# Altium PCB PCB_RAM1.PcbDoc
Units mil, origin at the board's own origin, x right, y up, seen from the top; angles counter-clockwise.
Board outline 3440 x 3440 mil, 4 copper layers (Top Signal, PWR, GND, Bottom Signal), stack 23.756 mil thick; 46 components, 96 nets, 440 pads, 4 vias.
Unrouted connection lines stored in the file: 252.
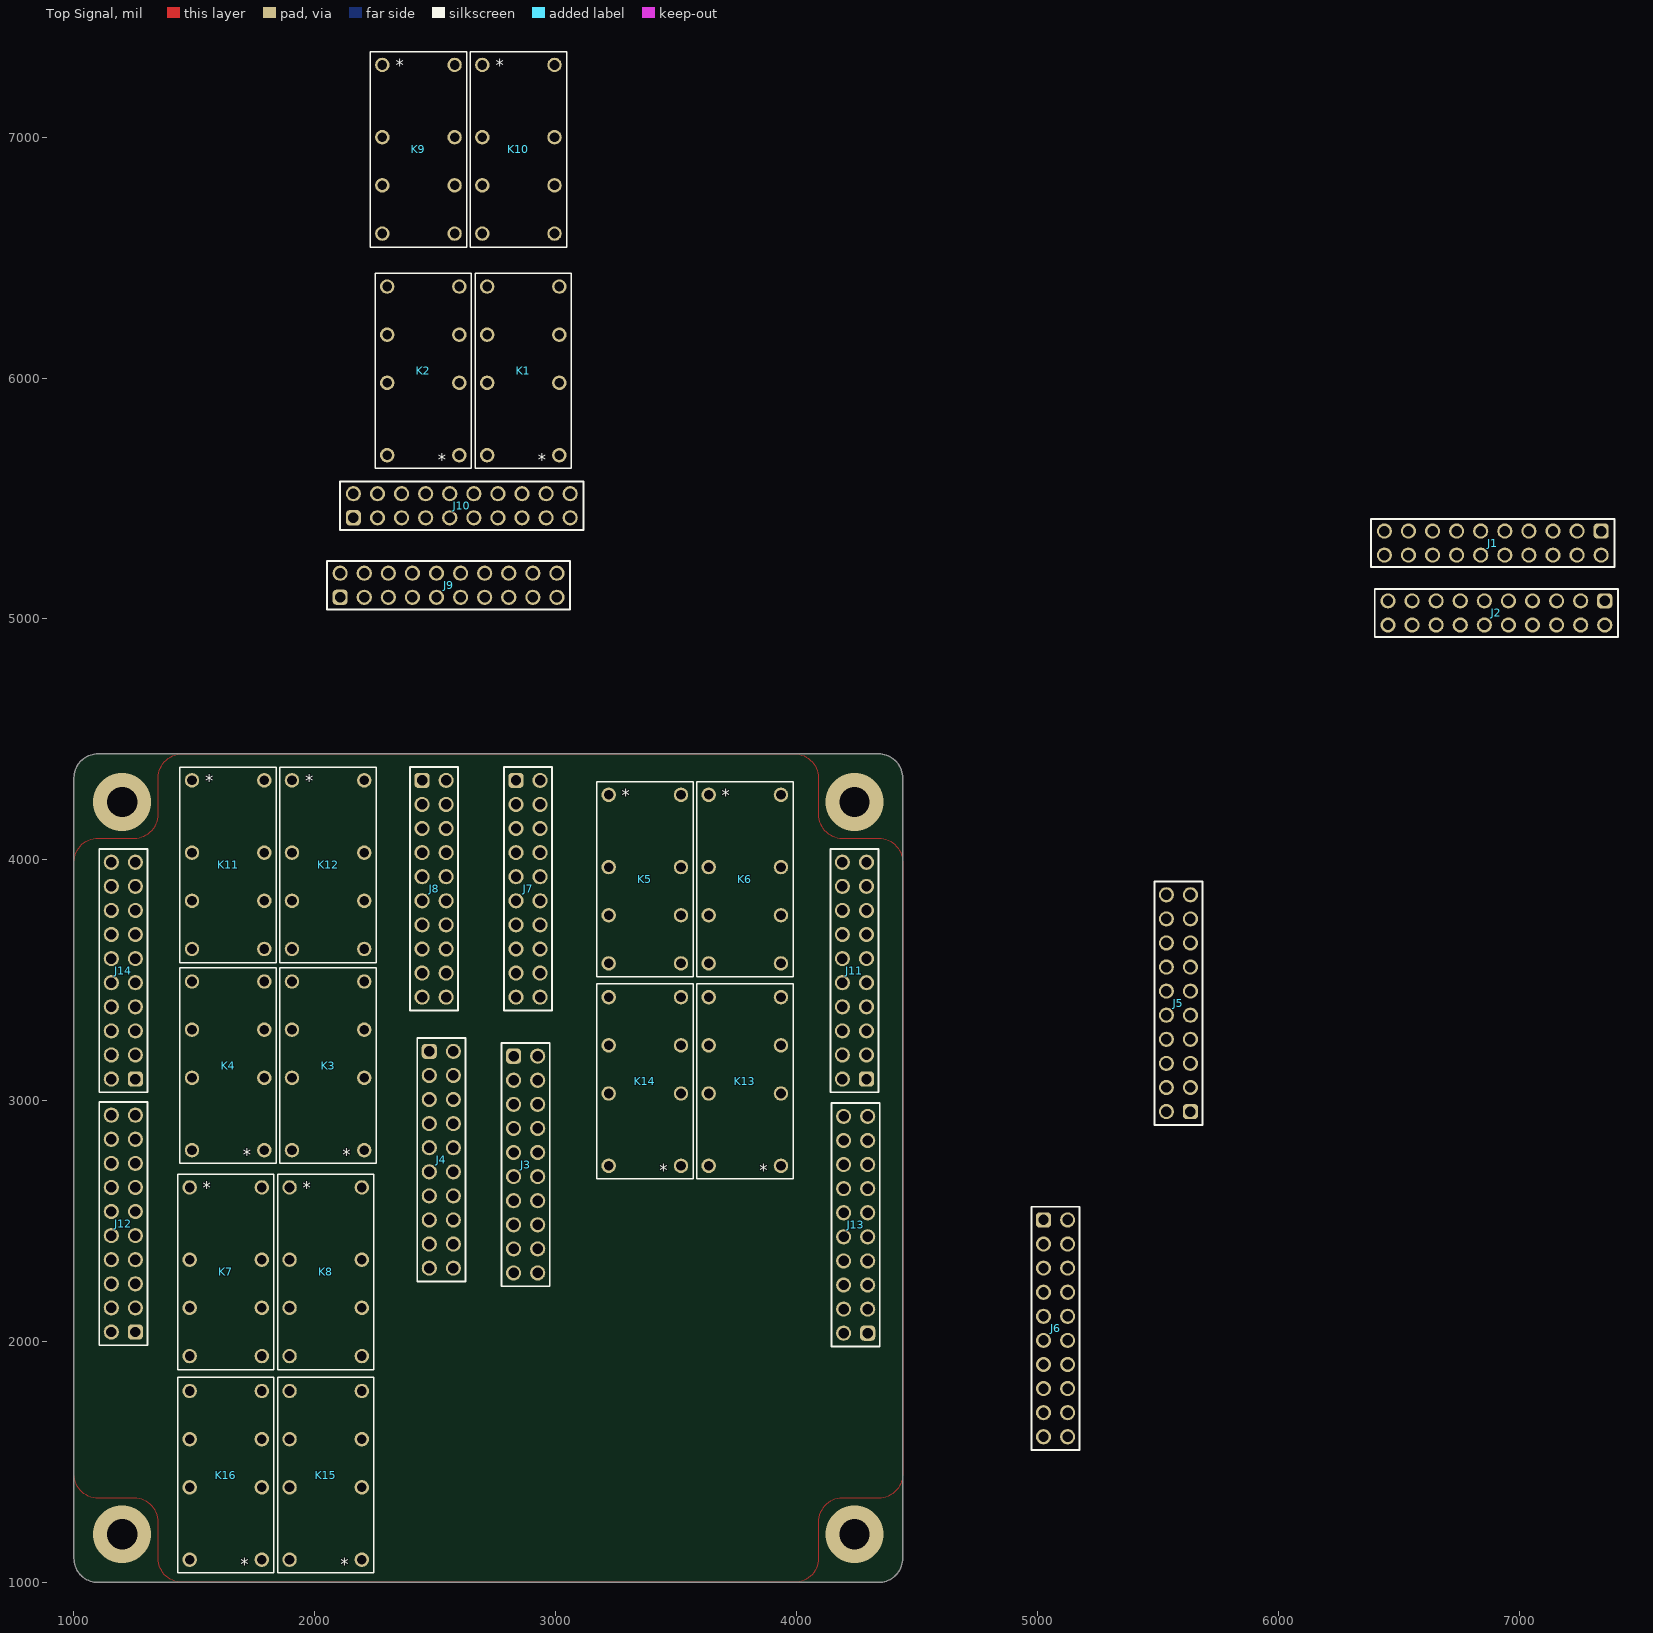
[diagram p0: Top Signal view]
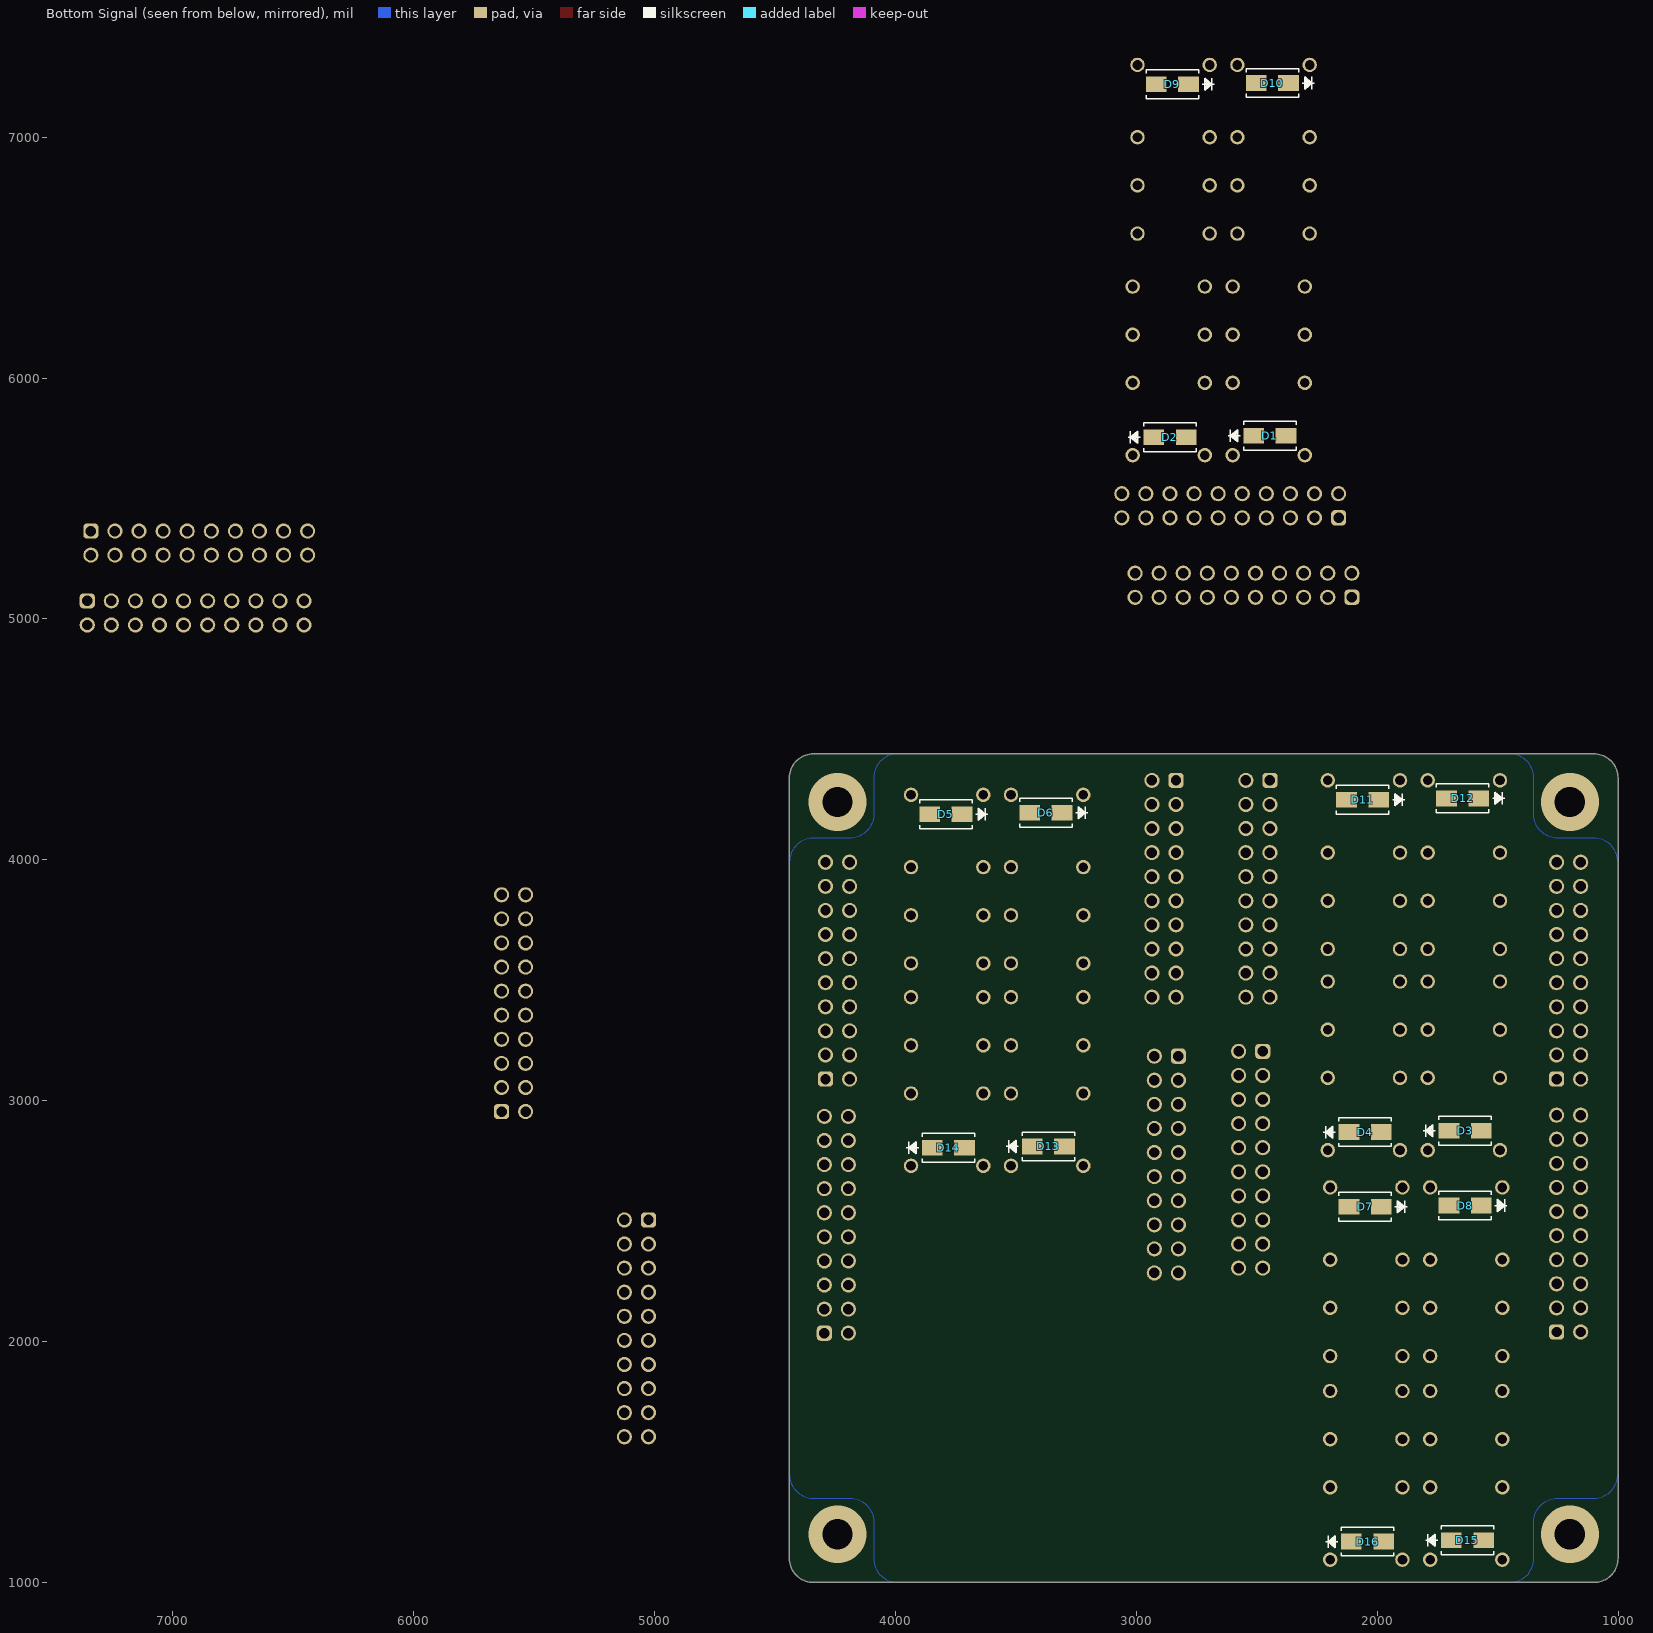
[diagram p1: Bottom Signal view, seen from below]
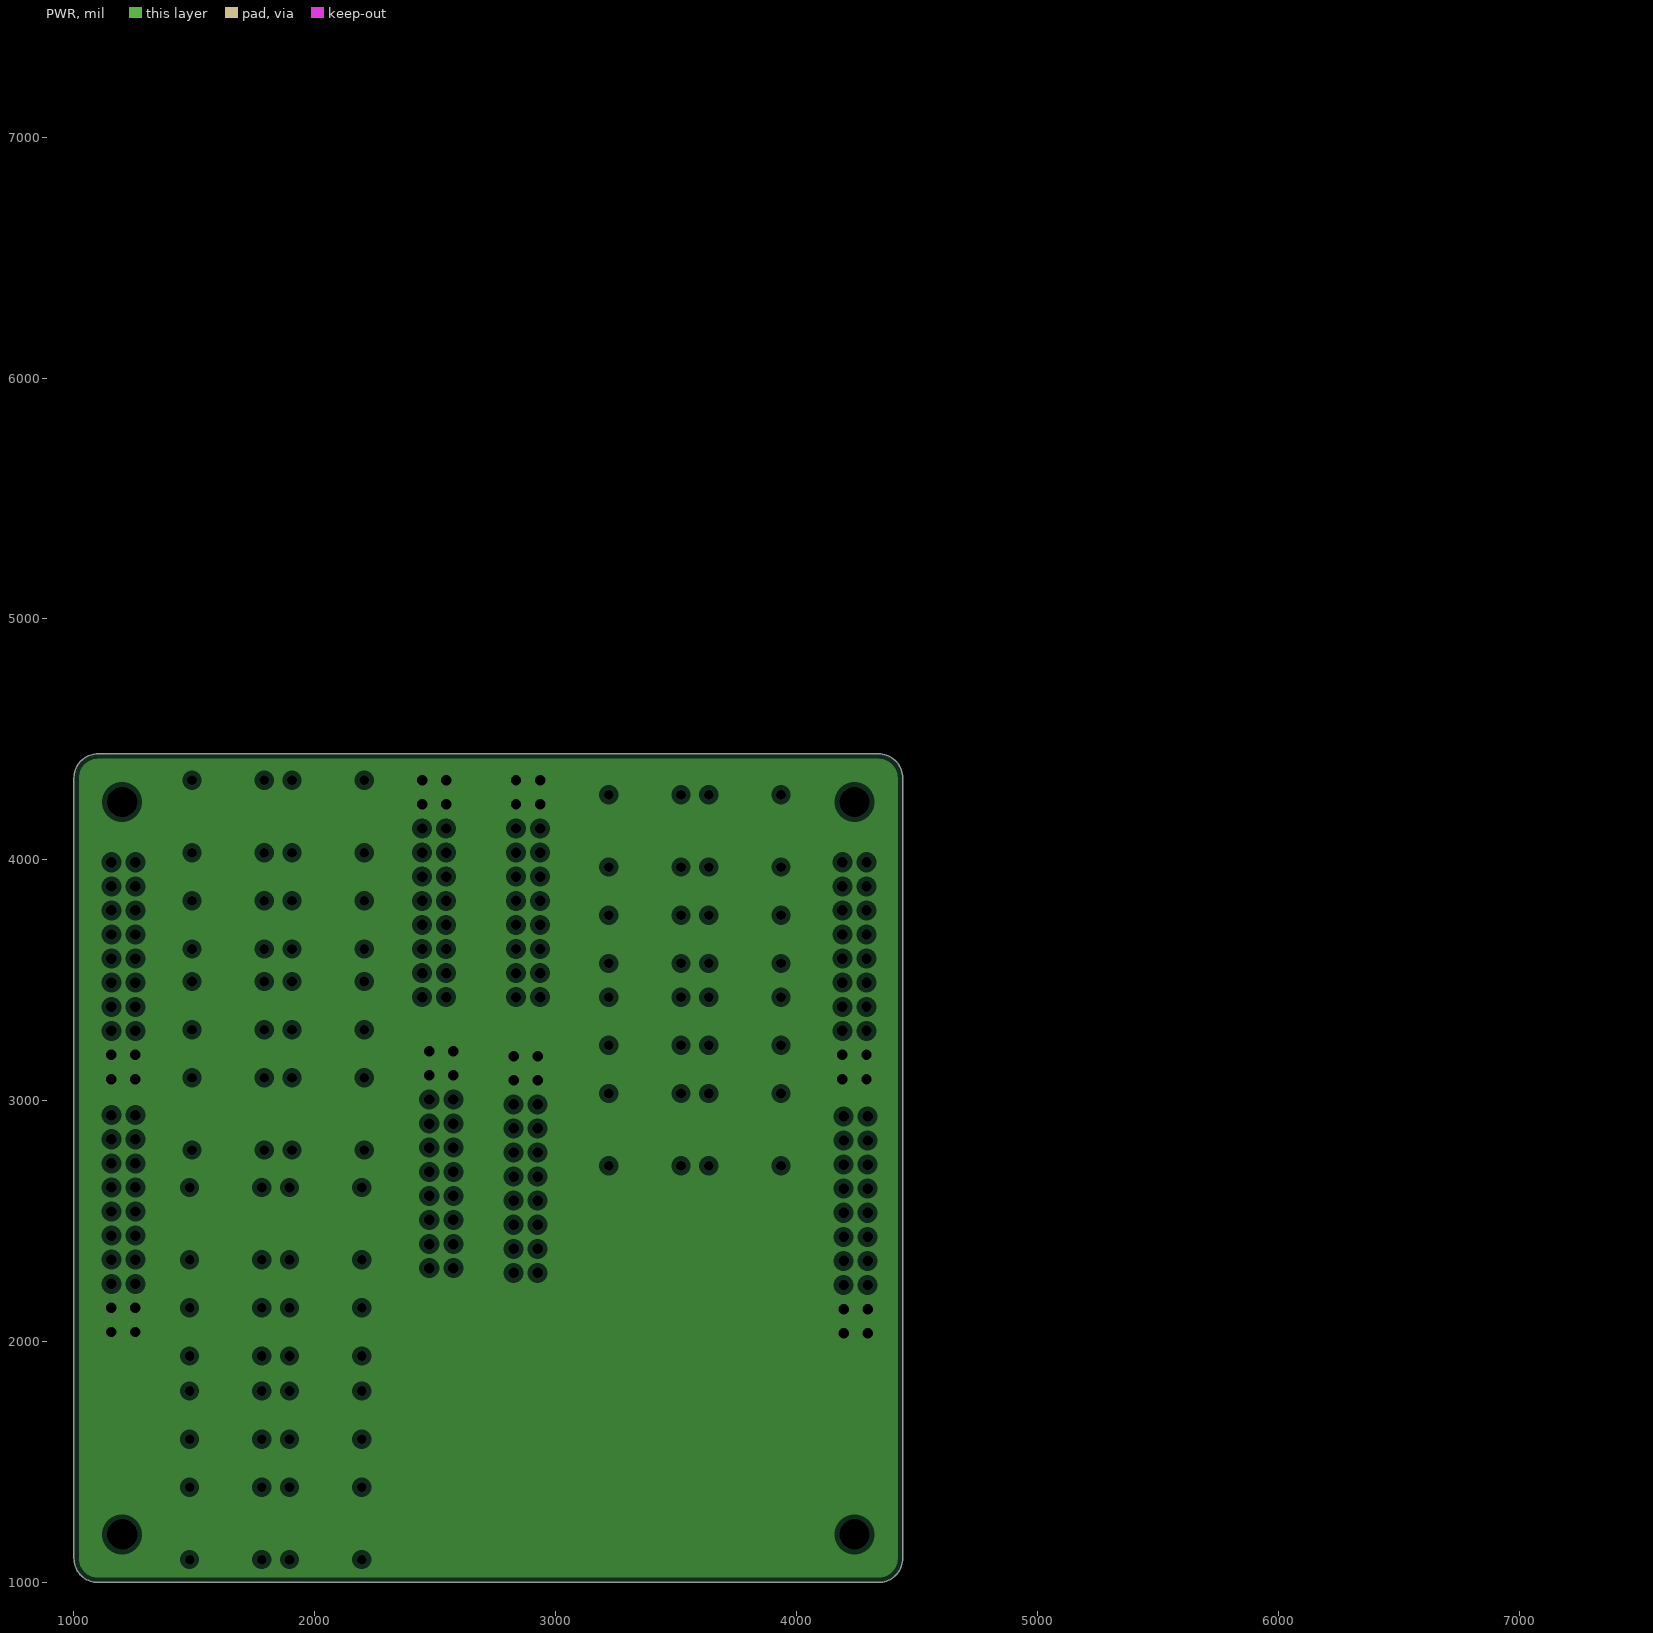
[diagram p2: PWR, clearances drawn from the general rule]
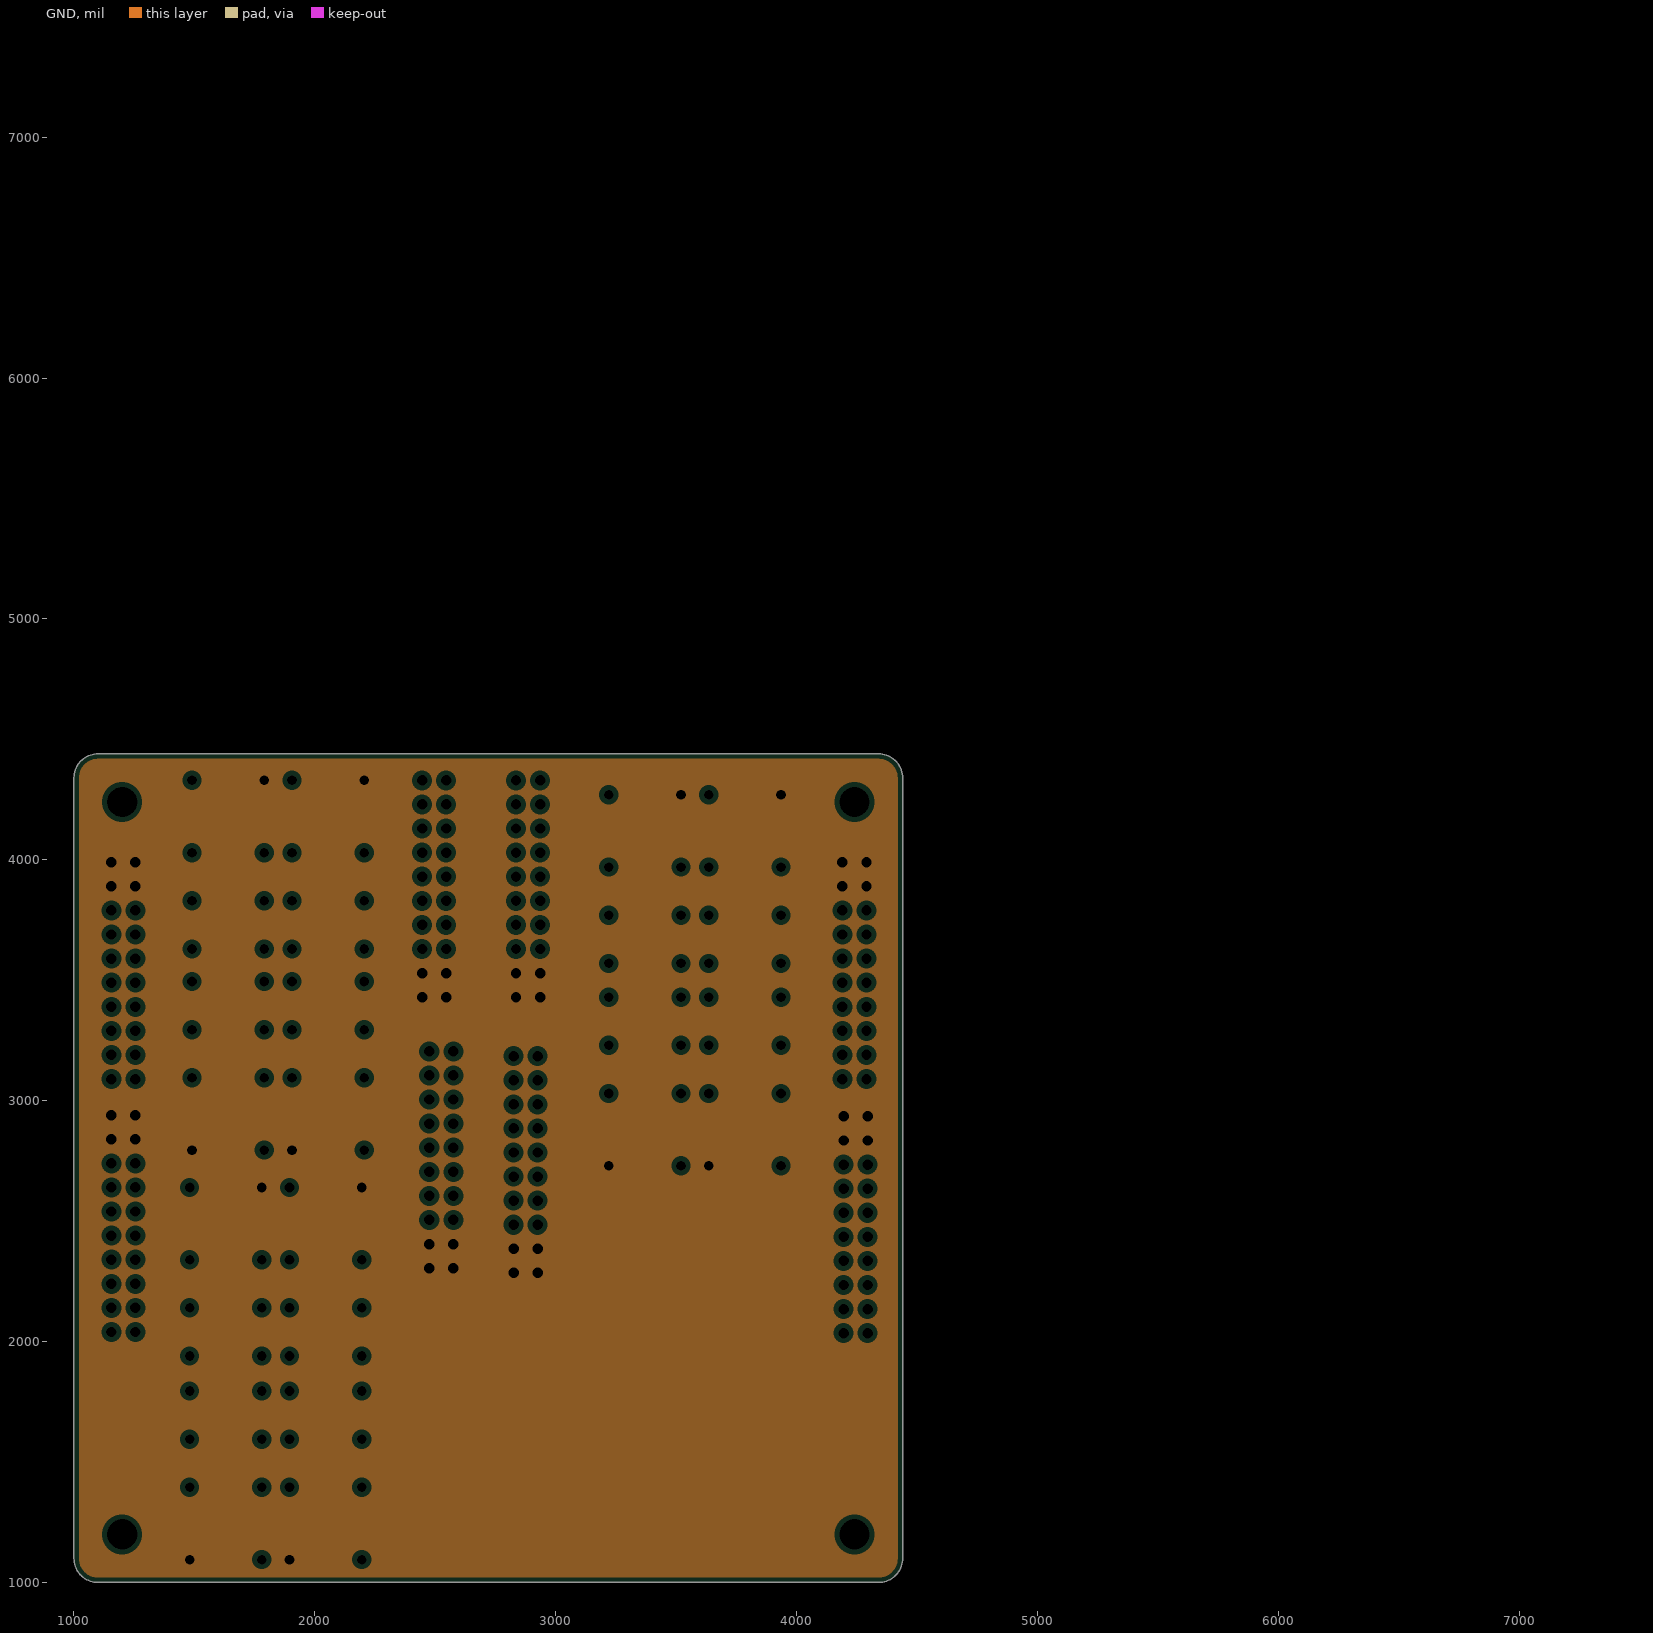
[diagram p3: GND, clearances drawn from the general rule]

## Layer stack, top to bottom
Top Solder: solder mask 0.4, Solder Resist, Dk 3.5
Top Signal: signal copper 1.4
Dielectric 2: prepreg 2.8, PP-006, Dk 4.1
PWR: plane copper 1.378, net +24V
Dielectric 1: dielectric 12.6, FR-4, Dk 4.8
GND: plane copper 1.378, net GND
Dielectric 3: prepreg 2.8, PP-006, Dk 4.1
Bottom Signal: signal copper 1.4
Bottom Solder: solder mask 0.4, Solder Resist, Dk 3.5

## Board outline
1000,4340 cw(c1100,4340) 1100,4440 4340,4440 cw(c4340,4340) 4440,4340 4440,1100 cw(c4340,1100) 4340,1000 1100,1000 cw(c1100,1100) 1000,1100 1000,2825

## Design rules (kind name [scope] priority, off if disabled: settings)
Clearance [All] p1: gap=10 ignorepadtopadclearanceinfootprint=FALSE
PlaneClearance [All] p1: clearance=20
PlaneConnect [All] p1: planeconnectstyle=Relief reliefexpansion=20 reliefentries=4 reliefconductorwidth=10 reliefairgap=10
PolygonConnect [All] p1: connectstyle=Relief reliefconductorwidth=10 reliefentries=4 polygonreliefangle="90 Angle" airgapwidth=10
RoomDefinition U_4bitMux28 [InComponentClass('U_4bitMux28')] p1: confinementstyle=ConfineIn formatcopy=TRUE lockcomponents=FALSE outline 2265,1870 1325,1870 1325,1020 2265,1020
RoomDefinition U_4bitMux24 [InComponentClass('U_4bitMux24')] p2: confinementstyle=ConfineIn formatcopy=TRUE lockcomponents=FALSE outline 1410,1865 2350,1865 2350,2715 1410,2715
RoomDefinition U_4bitMux22 [InComponentClass('U_4bitMux22')] p3: confinementstyle=ConfineIn formatcopy=TRUE lockcomponents=FALSE outline 2275,3570 1335,3570 1335,2720 2275,2720
RoomDefinition U_4bitMux23 [InComponentClass('U_4bitMux23')] p4: confinementstyle=ConfineIn formatcopy=TRUE lockcomponents=FALSE outline 3150,3495 4090,3495 4090,4345 3150,4345
RoomDefinition U_4bitMux27 [InComponentClass('U_4bitMux27')] p5: confinementstyle=ConfineIn formatcopy=TRUE lockcomponents=FALSE outline 4005,3505 3065,3505 3065,2655 4005,2655
RoomDefinition U_4bitMux26 [InComponentClass('U_4bitMux26')] p6: confinementstyle=ConfineIn formatcopy=TRUE lockcomponents=FALSE outline 1420,3555 2360,3555 2360,4405 1420,4405
RoomDefinition U_4bitMux25 [InComponentClass('U_4bitMux25')] p7: confinementstyle=ConfineIn formatcopy=TRUE lockcomponents=FALSE outline 2210,6525 3150,6525 3150,7375 2210,7375
RoomDefinition U_4bitMux21 [InComponentClass('U_4bitMux21')] p8: confinementstyle=ConfineIn formatcopy=TRUE lockcomponents=FALSE outline 3085,6455 2145,6455 2145,5605 3085,5605
RoutingVias [All] p1: holewidth=28 width=50 viastyle="Through Hole" minholewidth=28 minwidth=50 maxholewidth=28 maxwidth=50
SolderMaskExpansion [All] p1: expansion=4 istentingtop=FALSE
SupplyNets "Schematic Supply Nets_1" [InNet('GND')] p1: voltage=0.000
SupplyNets "Schematic Supply Nets" [InNet('+24V')] p2: voltage=0.000
Width [All] p1: maxlimit=10 minlimit=10 preferedwidth=10
28 further rules are at their usual default settings.

## Classes and differential pairs
channel class 4bitMux2_flipped: U_4bitMux21 U_4bitMux22 U_4bitMux23 U_4bitMux24 U_4bitMux25 U_4bitMux26 U_4bitMux27 U_4bitMux28
component class RAM1_top: J1 J2 J3 J4 J5 J6 J7 J8 J9 J10 J11 J12 J13 J14
component class U_4bitMux28: D15 D16 K15 K16
component class U_4bitMux27: D13 D14 K13 K14
component class U_4bitMux26: D11 D12 K11 K12
component class U_4bitMux25: D9 D10 K9 K10
component class U_4bitMux24: D7 D8 K7 K8
component class U_4bitMux23: D5 D6 K5 K6
component class U_4bitMux22: D3 D4 K3 K4
component class U_4bitMux21: D1 D2 K1 K2

## Components (designator, comment, footprint, x,y, rotation, side; value= is the part's Value field where it differs from the comment)
D1 "SMAJ24A" "DI SMAJ24A" 2445,5760 r180 bottom value=650pF (schematic designator D)
D2 "SMAJ24A" "DI SMAJ24A" 2860,5755 r180 bottom value=650pF (schematic designator D)
D3 "SMAJ24A" "DI SMAJ24A" 1635,2875 r180 bottom value=650pF (schematic designator D)
D4 "SMAJ24A" "DI SMAJ24A" 2050,2870 r180 bottom value=650pF (schematic designator D)
D5 "SMAJ24A" "DI SMAJ24A" 3790,4190 r0 bottom value=650pF (schematic designator D)
D6 "SMAJ24A" "DI SMAJ24A" 3375,4195 r0 bottom value=650pF (schematic designator D)
D7 "SMAJ24A" "DI SMAJ24A" 2050,2560 r0 bottom value=650pF (schematic designator D)
D8 "SMAJ24A" "DI SMAJ24A" 1635,2565 r0 bottom value=650pF (schematic designator D)
D9 "SMAJ24A" "DI SMAJ24A" 2850,7220 r0 bottom value=650pF (schematic designator D)
D10 "SMAJ24A" "DI SMAJ24A" 2435,7225 r0 bottom value=650pF (schematic designator D)
D11 "SMAJ24A" "DI SMAJ24A" 2060,4250 r0 bottom value=650pF (schematic designator D)
D12 "SMAJ24A" "DI SMAJ24A" 1645,4255 r0 bottom value=650pF (schematic designator D)
D13 "SMAJ24A" "DI SMAJ24A" 3365,2810 r180 bottom value=650pF (schematic designator D)
D14 "SMAJ24A" "DI SMAJ24A" 3780,2805 r180 bottom value=650pF (schematic designator D)
D15 "SMAJ24A" "DI SMAJ24A" 1625,1175 r180 bottom value=650pF (schematic designator D)
D16 "SMAJ24A" "DI SMAJ24A" 2040,1170 r180 bottom value=650pF (schematic designator D)
J1 "Con 2.54mm 10x2pos" "Con 2.54mm 10x2pos" 6890,5315 r180 top
J2 "Con 2.54mm 10x2pos" "Con 2.54mm 10x2pos" 6905,5025 r180 top
J3 "Con 2.54mm 10x2pos" "Con 2.54mm 10x2pos" 2875,2735 r270 top
J4 "Con 2.54mm 10x2pos" "Con 2.54mm 10x2pos" 2525,2755 r270 top
J5 "Con 2.54mm 10x2pos" "Con 2.54mm 10x2pos" 5585,3405 r90 top
J6 "Con 2.54mm 10x2pos" "Con 2.54mm 10x2pos" 5075,2055 r270 top
J7 "Con 2.54mm 10x2pos" "Con 2.54mm 10x2pos" 2885,3880 r270 top
J8 "Con 2.54mm 10x2pos" "Con 2.54mm 10x2pos" 2495,3880 r270 top
J9 "Con 2.54mm 10x2pos" "Con 2.54mm 10x2pos" 2555,5140 r0 top
J10 "Con 2.54mm 10x2pos" "Con 2.54mm 10x2pos" 2610,5470 r0 top
J11 "Con 2.54mm 10x2pos" "Con 2.54mm 10x2pos" 4240,3540 r90 top
J12 "Con 2.54mm 10x2pos" "Con 2.54mm 10x2pos" 1205,2490 r90 top
J13 "Con 2.54mm 10x2pos" "Con 2.54mm 10x2pos" 4245,2485 r90 top
J14 "Con 2.54mm 10x2pos" "Con 2.54mm 10x2pos" 1205,3540 r90 top
K1 "J104D2C24VDC.15S" "Relay J104D2C24VDC.15S" 3015,5680 r180 top (schematic designator K)
K2 "J104D2C24VDC.15S" "Relay J104D2C24VDC.15S" 2600,5680 r180 top (schematic designator K)
K3 "J104D2C24VDC.15S" "Relay J104D2C24VDC.15S" 2205,2795 r180 top (schematic designator K)
K4 "J104D2C24VDC.15S" "Relay J104D2C24VDC.15S" 1790,2795 r180 top (schematic designator K)
K5 "J104D2C24VDC.15S" "Relay J104D2C24VDC.15S" 3220,4270 r0 top (schematic designator K)
K6 "J104D2C24VDC.15S" "Relay J104D2C24VDC.15S" 3635,4270 r0 top (schematic designator K)
K7 "J104D2C24VDC.15S" "Relay J104D2C24VDC.15S" 1480,2640 r0 top (schematic designator K)
K8 "J104D2C24VDC.15S" "Relay J104D2C24VDC.15S" 1895,2640 r0 top (schematic designator K)
K9 "J104D2C24VDC.15S" "Relay J104D2C24VDC.15S" 2280,7300 r0 top (schematic designator K)
K10 "J104D2C24VDC.15S" "Relay J104D2C24VDC.15S" 2695,7300 r0 top (schematic designator K)
K11 "J104D2C24VDC.15S" "Relay J104D2C24VDC.15S" 1490,4330 r0 top (schematic designator K)
K12 "J104D2C24VDC.15S" "Relay J104D2C24VDC.15S" 1905,4330 r0 top (schematic designator K)
K13 "J104D2C24VDC.15S" "Relay J104D2C24VDC.15S" 3935,2730 r180 top (schematic designator K)
K14 "J104D2C24VDC.15S" "Relay J104D2C24VDC.15S" 3520,2730 r180 top (schematic designator K)
K15 "J104D2C24VDC.15S" "Relay J104D2C24VDC.15S" 2195,1095 r180 top (schematic designator K)
K16 "J104D2C24VDC.15S" "Relay J104D2C24VDC.15S" 1780,1095 r180 top (schematic designator K)

## Footprints (in the part's own frame and the unit in brackets; to place one, negate y for a bottom-side part, rotate by r counter-clockwise, add the part's x,y. Pads: shape width x height; smd on the part's side, far side on the other; paste and mask are expansions set on the pad)
"Con 2.54mm 10x2pos" [mm]
  rrect50% 1.6x1.6 hole 1.1: 1(-11.43,-1.27)
  round 1.6 hole 1.1: 2(-11.43,1.27) 3(-8.89,-1.27) 4(-8.89,1.27) 5(-6.35,-1.27) 6(-6.35,1.27) 7(-3.81,-1.27) 8(-3.81,1.27) 9(-1.27,-1.27) 10(-1.27,1.27) 11(1.27,-1.27) 12(1.27,1.27) 13(3.81,-1.27) 14(3.81,1.27) 15(6.35,-1.27) 16(6.35,1.27) 17(8.89,-1.27) 18(8.89,1.27) 19(11.43,-1.27) 20(11.43,1.27)
  silkscreen extent -12.83,-2.54 12.83,2.54
"DI SMAJ24A" [mil]
  rect 86x65 smd paste+0 mask+4: 1(-67,0) 2(67,0)
  silkscreen extent -174,-60 109,60, body extent -104,-55 104,55, height 92
"Relay J104D2C24VDC.15S" [mil]
  round 60 hole 40 paste-99999 mask+0: 1(0,0) 2(0,-300) 3(0,-500) 4(0,-700) 5(300,-700) 6(300,-500) 7(300,-300) 8(300,0)
  silkscreen extent -50,-756 350,54, body extent -45,-751 345,49, height 450

## Part data
D1 D2 D3 D4 D5 D6 D7 D8 D9 D10 D11 D12 D13 D14 D15 D16: library part "DI SMAJ24A", "SMAJ Series 400 W 24 V Uni-Directional Surface Mount TVS Diode - DO-214AC", Breakdown Voltage=28.1V, Case/Package=SMA, Clamping Voltage=38.9V, Forward Voltage=3.5V, Leakage Current=1µA, Manufacturer=Littelfuse, Max Breakdown Voltage=29.5V, Max Junction Temperature (Tj)=150°C, Max Output current=10.3A, Max Power Dissipation=3.3W, Min Breakdown Voltage=26.7V, Min Operating Temperature=-65°C, Operating Supply Voltage=24V, Peak Pulse Power=400W, Power Line Protection=No, Supplier Part Number=SMAJ24ALFCT-ND, Test Current=1mA, Category="TVS Diodes", China RoHS=Non-Compliant, ComponentLink1Description=https://datasheet.octopart.com:443/SMAJ24A-Littelfuse-datasheet-150463581.pdf?src-supplier=Farnell, ComponentLink1URL=https://datasheet.octopart.com:443/SMAJ24A-Littelfuse-datasheet-150463581.pdf?src-supplier=Farnell, ComponentLink2Description=https://datasheet.octopart.com:443/SMAJ24A-Littelfuse-datasheet-63710798.pdf?src-supplier=element14+APAC, ComponentLink2URL=https://datasheet.octopart.com:443/SMAJ24A-Littelfuse-datasheet-63710798.pdf?src-supplier=element14+APAC, ComponentLink3Description=https://datasheet.octopart.com:443/SMAJ24A-Littelfuse-datasheet-11547152.pdf?src-supplier=element14+APAC, ComponentLink3URL=https://datasheet.octopart.com:443/SMAJ24A-Littelfuse-datasheet-11547152.pdf?src-supplier=element14+APAC, ComponentLink4Description=https://datasheet.octopart.com:443/SMAJ24A-Littelfuse-datasheet-5393952.pdf?src-supplier=element14+APAC, ComponentLink4URL=https://datasheet.octopart.com:443/SMAJ24A-Littelfuse-datasheet-5393952.pdf?src-supplier=element14+APAC, ComponentLink5Description=https://datasheet.octopart.com:443/SMAJ24A-Littelfuse-datasheet-511791.pdf?src-supplier=element14+APAC, ComponentLink5URL=https://datasheet.octopart.com:443/SMAJ24A-Littelfuse-datasheet-511791.pdf?src-supplier=element14+APAC, ComponentLink6Description=https://datasheet.octopart.com:443/SMAJ24A-Littelfuse-datasheet-164649624.pdf?src-supplier=JRH+Electronics, ComponentLink6URL=https://datasheet.octopart.com:443/SMAJ24A-Littelfuse-datasheet-164649624.pdf?src-supplier=JRH+Electronics, ComponentLink7Description=https://datasheet.octopart.com:443/SMAJ24A-Littelfuse-datasheet-38878911.pdf?src-supplier=RS+(Formerly+Allied+Electronics), ComponentLink7URL=https://datasheet.octopart.com:443/SMAJ24A-Littelfuse-datasheet-38878911.pdf?src-supplier=RS+(Formerly+Allied+Electronics), ComponentLink8Description=https://datasheet.octopart.com:443/SMAJ24A-Littelfuse-datasheet-17901671.pdf?src-supplier=Future+Electronics, ComponentLink8URL=https://datasheet.octopart.com:443/SMAJ24A-Littelfuse-datasheet-17901671.pdf?src-supplier=Future+Electronics, ComponentLink9Description=https://datasheet.octopart.com:443/SMAJ24A-Littelfuse-datasheet-1053.pdf?src-supplier=DigiKey, ComponentLink9URL=https://datasheet.octopart.com:443/SMAJ24A-Littelfuse-datasheet-1053.pdf?src-supplier=DigiKey, Composition=Zener, Direction=Unidirectional, Element Configuration=Single, Height=2.29mm, Lead Free="Lead Free", Length=4.5mm, Lifecycle Status=Production, Manufacturer Part Number=SMAJ24A, Max Operating Temperature=150°C, Max Reverse Leakage Current=1µA, Max Surge Current=10.3A, Mounting Technology="Surface Mount", Number of Channels=1, Number of Elements=1, Number of Terminals=2, Number of Unidirectional Channels=1, Packaging="Tape & Reel", Peak Pulse Current=10.3A, Peak Reverse Current=1µA, Pins=2, Polarity=Unidirectional, Power Dissipation=400W, Power Rating=400W, Pricing="1=0.21, 10=0.113, 100=0.074, 500=0.072, 1000=0.071 (USD)", Radiation Hardening=No, REACH SVHC=No, Reverse Breakdown Voltage=26.7V, Reverse Standoff Voltage=24V, Reverse Voltage=24V, RoHS=Compliant, Schedule B="8541100080, 8541100080|8541100080|8541100080|8541100080|8541100080", Stock=97583, Supplier=DigiKey, Termination=SMD/SMT, Voltage Rating (DC)=24V, Width=2.79mm
J1 J2 J3 J4 J5 J6 J7 J8 J9 J10 J11 J12 J13 J14: "WR-BHD Straight Male, Box Header, Through Hole, 2 Rows, 20 Contacts, 2.54mm Pitch", Color=Black, Contact Resistance=20mΩ, Current Rating=3A, Flammability Rating="UL94 V-0", Insulation Resistance=1GΩ, Manufacturer="Wurth Elektronik", Manufacturer Part Number=61202021621, Max Operating Temperature=105°C, Min Operating Temperature=-40°C, Operating Supply Voltage=250V, Supplier Part Number=732-2096-ND, Category="Headers and Wire Housings", ComponentLink1Description=https://datasheet.octopart.com:443/61202021621-W%C3%BCrth-Elektronik-datasheet-111087935.pdf?src-supplier=Upverter, ComponentLink1URL=https://datasheet.octopart.com:443/61202021621-W%C3%BCrth-Elektronik-datasheet-111087935.pdf?src-supplier=Upverter, ComponentLink2Description=https://datasheet.octopart.com:443/61202021621-Wurth-Elektronik-datasheet-168480024.pdf?src-supplier=Wurth+Elektronik, ComponentLink2URL=https://datasheet.octopart.com:443/61202021621-Wurth-Elektronik-datasheet-168480024.pdf?src-supplier=Wurth+Elektronik, ComponentLink3Description=https://datasheet.octopart.com:443/61202021621-W%C3%BCrth-Elektronik-datasheet-149523954.pdf?src-supplier=Farnell, ComponentLink3URL=https://datasheet.octopart.com:443/61202021621-W%C3%BCrth-Elektronik-datasheet-149523954.pdf?src-supplier=Farnell, ComponentLink4Description=https://datasheet.octopart.com:443/61202021621-W%C3%BCrth-Elektronik-Midcom-datasheet-10469446.pdf?src-supplier=Farnell, ComponentLink4URL=https://datasheet.octopart.com:443/61202021621-W%C3%BCrth-Elektronik-Midcom-datasheet-10469446.pdf?src-supplier=Farnell, ComponentLink5Description=https://datasheet.octopart.com:443/61202021621-W%C3%BCrth-Elektronik-Midcom-datasheet-5367532.pdf?src-supplier=element14+APAC, ComponentLink5URL=https://datasheet.octopart.com:443/61202021621-W%C3%BCrth-Elektronik-Midcom-datasheet-5367532.pdf?src-supplier=element14+APAC, Connector Type="Male Pin", Contact Gender=Male, Contact Material=Gold, Contact Plating=Gold, Gender=Male, Height=9.25mm, Housing Material=PBT, Insulation=Insulated, Insulation Material=PBT, Lead Pitch=2.54mm, Length=33.06mm, Mounting Technology="Through Hole", Number of Contacts=20, Number of Positions=20, Number of Rows=2, Orientation=Vertical, Pins=20, Pitch=2.54mm, Pricing="1=0.86, 10=0.839, 50=0.7732, 160=0.69213, 320=0.64375 (USD)", RoHS=Compliant, Row Spacing=2.54mm, Stock=12933, Supplier=DigiKey, Termination="Through Hole", Voltage Rating=250V, Voltage Rating (DC)=250V, Width=33.06mm
K1 K2 K3 K4 K5 K6 K7 K8 K9 K10 K11 K12 K13 K14 K15 K16: library part "Relay J104D2C24VDC.15S", "Relay Ul Gen Purp DPDT 2C 24VDC", Coil Current=6mA, Coil Power=150mW, Coil Resistance=3.84kΩ, Coil Voltage (DC)=18V, Contact Current Rating=2A, Contact Resistance=50mΩ, Contact Voltage Rating (AC)=250V, Insulation Resistance=100MΩ, Manufacturer="CIT Relay & Switch", Max Operating Temperature=85°C, Max Voltage Rating (DC)=100V, Min Operating Temperature=-40°C, Supplier Part Number=2449-J104D2C24VDC.15S-ND, Category="Signal Relays", Contact Plating=Gold, Electrical Life=100kcycles, Height=11.42mm, Length=20.37mm, Manufacturer Part Number=J104D2C24VDC.15S, Max Current Rating=2A, Number of Terminals=8, Pricing="1=1.26, 20=1.082, 40=1.045, 60=1.02383, 100=0.998, 260=0.95115, 500=0.92036, 1000=0.88878, 5000=0.8195 (USD)", Release Time=4ms, Response Time=6ms, Stock=5620, Supplier=DigiKey, Throw Configuration=DPDT

## Via types
v1: diameter 240, hole 126, Top Signal to Bottom Signal, 4 vias

## Nets (pads, with @x,y where several pads share a name; then routed paths per layer and width w, separated by ;. In a path a pad name is that pad's centre, name@x,y a point inside that pad or via, vN(x,y) a via of type N, cw(c..) or ccw(c..) an arc to the next point about the centre after c; other vN are vias at no path point)
+24V: J1.1 J1.2 J1.3 J1.4 J2.1 J2.2 J2.3 J2.4 J3.1 J3.2 J3.3 J3.4 J4.1 J4.2 J4.3 J4.4 J5.1 J5.2 J5.3 J5.4 J6.1 J6.2 J6.3 J6.4 J7.1 J7.2 J7.3 J7.4 J8.1 J8.2 J8.3 J8.4 J9.1 J9.2 J9.3 J9.4 J10.1 J10.2 J10.3 J10.4 J11.1 J11.2 J11.3 J11.4 J12.1 J12.2 J12.3 J12.4 J13.1 J13.2 J13.3 J13.4 J14.1 J14.2 J14.3 J14.4
Ab0: D1.1 D2.1 D3.1 D4.1 D5.1 D6.1 D7.1 D8.1 J5.6 K1.1 K2.1 K3.1 K4.1 K5.1 K6.1 K7.1 K8.1
Ab1: J5.8 J14.6
Ab2: J5.10 J14.8
Ab3: J5.12 J14.10
At0: D9.1 D10.1 D11.1 D12.1 D13.1 D14.1 D15.1 D16.1 J5.5 K9.1 K10.1 K11.1 K12.1 K13.1 K14.1 K15.1 K16.1
At1: J5.7 J14.5
At2: J5.9 J14.7
At3: J5.11 J14.9
CLK: J1.15 J2.15 J3.15 J4.15 J5.15 J7.15 J8.15 J9.15 J10.15 J14.12
GND: D1.2 D2.2 D3.2 D4.2 D5.2 D6.2 D7.2 D8.2 D9.2 D10.2 D11.2 D12.2 D13.2 D14.2 D15.2 D16.2 J1.17 J1.18 J1.19 J1.20 J2.17 J2.18 J2.19 J2.20 J3.17 J3.18 J3.19 J3.20 J4.17 J4.18 J4.19 J4.20 J5.17 J5.18 J5.19 J5.20 J6.17 J6.18 J6.19 J6.20 J7.17 J7.18 J7.19 J7.20 J8.17 J8.18 J8.19 J8.20 J9.17 J9.18 J9.19 J9.20 J10.17 J10.18 J10.19 J10.20 J11.17 J11.18 J11.19 J11.20 J12.17 J12.18 J12.19 J12.20 J13.17 J13.18 J13.19 J13.20 J14.17 J14.18 J14.19 J14.20 K1.8 K2.8 K3.8 K4.8 K5.8 K6.8 K7.8 K8.8 K9.8 K10.8 K11.8 K12.8 K13.8 K14.8 K15.8 K16.8
r0D0: J1.5 J2.5 J3.5 J4.5 J6.5 J7.5 J8.5 J9.5 J10.5
r0D1: J1.7 J2.7 J3.7 J4.7 J6.7 J7.7 J8.7 J9.7 J10.7
r0D2: J1.9 J2.9 J3.9 J4.9 J6.9 J7.9 J8.9 J9.9 J10.9
r0D3: J1.11 J2.11 J3.11 J4.11 J6.11 J7.11 J8.11 J9.11 J10.11
r0LD: J1.13
r0Q0: J1.6 K8.6 K15.3
r0Q1: J1.8 K8.3 K15.6
r0Q2: J1.10 K7.6 K16.3
r0Q3: J1.12 K7.3 K16.6
r0r1RDb0: J11.6 K8.7
r0r1RDb1: J11.8 K8.2
r0r1RDb2: J11.10 K7.7
r0r1RDb3: J11.12 K7.2
r0r1RDt0: J11.5 K15.2
r0r1RDt1: J11.7 K15.7
r0r1RDt2: J11.9 K16.2
r0r1RDt3: J11.11 K16.7
r1LD: J2.13
r1Q0: J2.6 K8.5 K15.4
r1Q1: J2.8 K8.4 K15.5
r1Q2: J2.10 K7.5 K16.4
r1Q3: J2.12 K7.4 K16.5
r2LD: J3.13
r2Q0: J3.6 K5.3 K13.3
r2Q1: J3.8 K5.6 K13.6
r2Q2: J3.10 K6.3 K14.3
r2Q3: J3.12 K6.6 K14.6
r2r3RDb0: J12.13 K5.2
r2r3RDb1: J12.15 K5.7
r2r3RDb2: J12.14 K6.2
r2r3RDb3: J12.16 K6.7
r2r3RDt0: J11.13 K13.2
r2r3RDt1: J11.15 K13.7
r2r3RDt2: J11.14 K14.2
r2r3RDt3: J11.16 K14.7
r3LD: J4.13
r3Q0: J4.6 K5.4 K13.4
r3Q1: J4.8 K5.5 K13.5
r3Q2: J4.10 K6.4 K14.4
r3Q3: J4.12 K6.5 K14.5
r4LD: J7.13
r4Q0: J7.6 K3.3 K11.3
r4Q1: J7.8 K3.6 K11.6
r4Q2: J7.10 K4.3 K12.3
r4Q3: J7.12 K4.6 K12.6
r4r5RDb0: J12.6 K3.2
r4r5RDb1: J12.8 K3.7
r4r5RDb2: J12.10 K4.2
r4r5RDb3: J12.12 K4.7
r4r5RDt0: J12.5 K11.2
r4r5RDt1: J12.7 K11.7
r4r5RDt2: J12.9 K12.2
r4r5RDt3: J12.11 K12.7
r5LD: J8.13
r5Q0: J8.6 K3.4 K11.4
r5Q1: J8.8 K3.5 K11.5
r5Q2: J8.10 K4.4 K12.4
r5Q3: J8.12 K4.5 K12.5
r6LD: J9.13
r6Q0: J9.6 K1.3 K9.3
r6Q1: J9.8 K1.6 K9.6
r6Q2: J9.10 K2.3 K10.3
r6Q3: J9.12 K2.6 K10.6
r6r7RDb0: J13.6 J14.13 K1.2
r6r7RDb1: J13.8 J14.15 K1.7
r6r7RDb2: J13.10 J14.14 K2.2
r6r7RDb3: J13.12 J14.16 K2.7
r6r7RDt0: J13.5 J13.13 K9.2
r6r7RDt1: J13.7 J13.15 K9.7
r6r7RDt2: J13.9 J13.14 K10.2
r6r7RDt3: J13.11 J13.16 K10.7
r7LD: J10.13
r7Q0: J10.6 K1.4 K9.4
r7Q1: J10.8 K1.5 K9.5
r7Q2: J10.10 K2.4 K10.4
r7Q3: J10.12 K2.5 K10.5
RDb0: J6.13
RDb1: J6.15
RDb2: J6.14
RDb3: J6.16
RDt0: J6.6
RDt1: J6.8
RDt2: J6.10
RDt3: J6.12
WE: J5.13 J14.11
pads on no net: J1.14 J1.16 J2.14 J2.16 J3.14 J3.16 J4.14 J4.16 J5.14 J5.16 J7.14 J7.16 J8.14 J8.16 J9.14 J9.16 J10.14 J10.16
copper on no net:
  other v1: 1200,1200 4240,1200 1200,4240 4240,4240

## Polygon pours and split planes (outlines as drawn)
no net on Bottom Signal "NONET_L04_P000" (solid, shelved, pour order 0): 1000,3990 cw(c1100,3990) 1100,4090 1250,4090 ccw(c1250,4190) 1350,4190 1350,4340 cw(c1450,4340) 1450,4440 3990,4440 cw(c3990,4340) 4090,4340 4090,4190 ccw(c4190,4190) 4190,4090 4340,4090 cw(c4340,3990) 4440,3990 4440,1450 cw(c4340,1450) 4340,1350 4190,1350 ccw(c4190,1250) 4090,1250 4090,1100 cw(c3990,1100) 3990,1000 1450,1000 cw(c1450,1100) 1350,1100 1350,1250 ccw(c1250,1250) 1250,1350 1100,1350 cw(c1100,1450) 1000,1450 1000,2725
no net on Top Signal "NONET_L01_P001" (solid, shelved, pour order 1): 1000,3990 cw(c1100,3990) 1100,4090 1250,4090 ccw(c1250,4190) 1350,4190 1350,4340 cw(c1450,4340) 1450,4440 3990,4440 cw(c3990,4340) 4090,4340 4090,4190 ccw(c4190,4190) 4190,4090 4340,4090 cw(c4340,3990) 4440,3990 4440,1450 cw(c4340,1450) 4340,1350 4190,1350 ccw(c4190,1250) 4090,1250 4090,1100 cw(c3990,1100) 3990,1000 1450,1000 cw(c1450,1100) 1350,1100 1350,1250 ccw(c1250,1250) 1250,1350 1100,1350 cw(c1100,1450) 1000,1450 1000,2725
GND on GND (split plane): 4347.84,4419.61 4355.61,4418.46 4363.22,4416.55 4370.61,4413.91 4377.71,4410.55 4384.44,4406.51 4390.75,4401.84 4396.57,4396.57 4401.84,4390.75 4406.51,4384.44 4410.55,4377.71 4413.91,4370.61 4416.55,4363.22 4418.46,4355.61 4419.61,4347.84 4419.97,4340.63 4419.9,4340 4419.9,1100 4419.97,1099.37 4419.61,1092.16 4418.46,1084.39 4416.55,1076.78 4413.91,1069.39 4410.55,1062.29 4406.51,1055.56 4401.84,1049.25 4396.57,1043.43 4390.75,1038.16 4384.44,1033.49 4377.71,1029.45 4370.61,1026.09 4363.22,1023.45 4355.61,1021.54 4347.84,1020.39 4340.63,1020.03 4340,1020.1 1100,1020.1 1099.37,1020.03 1092.16,1020.39 1084.39,1021.54 1076.78,1023.45 1069.39,1026.09 1062.29,1029.45 1055.56,1033.49 1049.25,1038.16 1043.43,1043.43 1038.16,1049.25 1033.49,1055.56 1029.45,1062.29 1026.09,1069.39 1023.45,1076.78 1021.54,1084.39 1020.39,1092.16 1020.03,1099.37 1020.1,1100 1020.1,2825 1020.1,4340 1020.03,4340.63 1020.39,4347.84 1021.54,4355.61 1023.45,4363.22 1026.09,4370.61 1029.45,4377.71 1033.49,4384.44 1038.16,4390.75 1043.43,4396.57 1049.25,4401.84 1055.56,4406.51 1062.29,4410.55 1069.39,4413.91 1076.78,4416.55 1084.39,4418.46 1092.16,4419.61 1099.37,4419.97 1100,4419.9 4340,4419.9 4340.63,4419.97
+24V on PWR (split plane): 4347.84,4419.61 4355.61,4418.46 4363.22,4416.55 4370.61,4413.91 4377.71,4410.55 4384.44,4406.51 4390.75,4401.84 4396.57,4396.57 4401.84,4390.75 4406.51,4384.44 4410.55,4377.71 4413.91,4370.61 4416.55,4363.22 4418.46,4355.61 4419.61,4347.84 4419.97,4340.63 4419.9,4340 4419.9,1100 4419.97,1099.37 4419.61,1092.16 4418.46,1084.39 4416.55,1076.78 4413.91,1069.39 4410.55,1062.29 4406.51,1055.56 4401.84,1049.25 4396.57,1043.43 4390.75,1038.16 4384.44,1033.49 4377.71,1029.45 4370.61,1026.09 4363.22,1023.45 4355.61,1021.54 4347.84,1020.39 4340.63,1020.03 4340,1020.1 1100,1020.1 1099.37,1020.03 1092.16,1020.39 1084.39,1021.54 1076.78,1023.45 1069.39,1026.09 1062.29,1029.45 1055.56,1033.49 1049.25,1038.16 1043.43,1043.43 1038.16,1049.25 1033.49,1055.56 1029.45,1062.29 1026.09,1069.39 1023.45,1076.78 1021.54,1084.39 1020.39,1092.16 1020.03,1099.37 1020.1,1100 1020.1,2825 1020.1,4340 1020.03,4340.63 1020.39,4347.84 1021.54,4355.61 1023.45,4363.22 1026.09,4370.61 1029.45,4377.71 1033.49,4384.44 1038.16,4390.75 1043.43,4396.57 1049.25,4401.84 1055.56,4406.51 1062.29,4410.55 1069.39,4413.91 1076.78,4416.55 1084.39,4418.46 1092.16,4419.61 1099.37,4419.97 1100,4419.9 4340,4419.9 4340.63,4419.97

## Text inside footprints (layer, text, board x,y; h text height)
K1: Top Overlay "*" at 2960,5705 h50 r180
K2: Top Overlay "*" at 2545,5705 h50 r180
K3: Top Overlay "*" at 2150,2820 h50 r180
K4: Top Overlay "*" at 1735,2820 h50 r180
K5: Top Overlay "*" at 3275,4245 h50
K6: Top Overlay "*" at 3690,4245 h50
K7: Top Overlay "*" at 1535,2615 h50
K8: Top Overlay "*" at 1950,2615 h50
K9: Top Overlay "*" at 2335,7275 h50
K10: Top Overlay "*" at 2750,7275 h50
K11: Top Overlay "*" at 1545,4305 h50
K12: Top Overlay "*" at 1960,4305 h50
K13: Top Overlay "*" at 3880,2755 h50 r180
K14: Top Overlay "*" at 3465,2755 h50 r180
K15: Top Overlay "*" at 2140,1120 h50 r180
K16: Top Overlay "*" at 1725,1120 h50 r180